# Altium PCB ESP_Final.PcbDoc
Units mil, origin at the board's own origin, x right, y up, seen from the top; angles counter-clockwise.
Board outline 4241 x 3936 mil, 2 copper layers (Top Layer, Bottom Layer); 101 components, 74 nets, 281 pads, 118 vias.
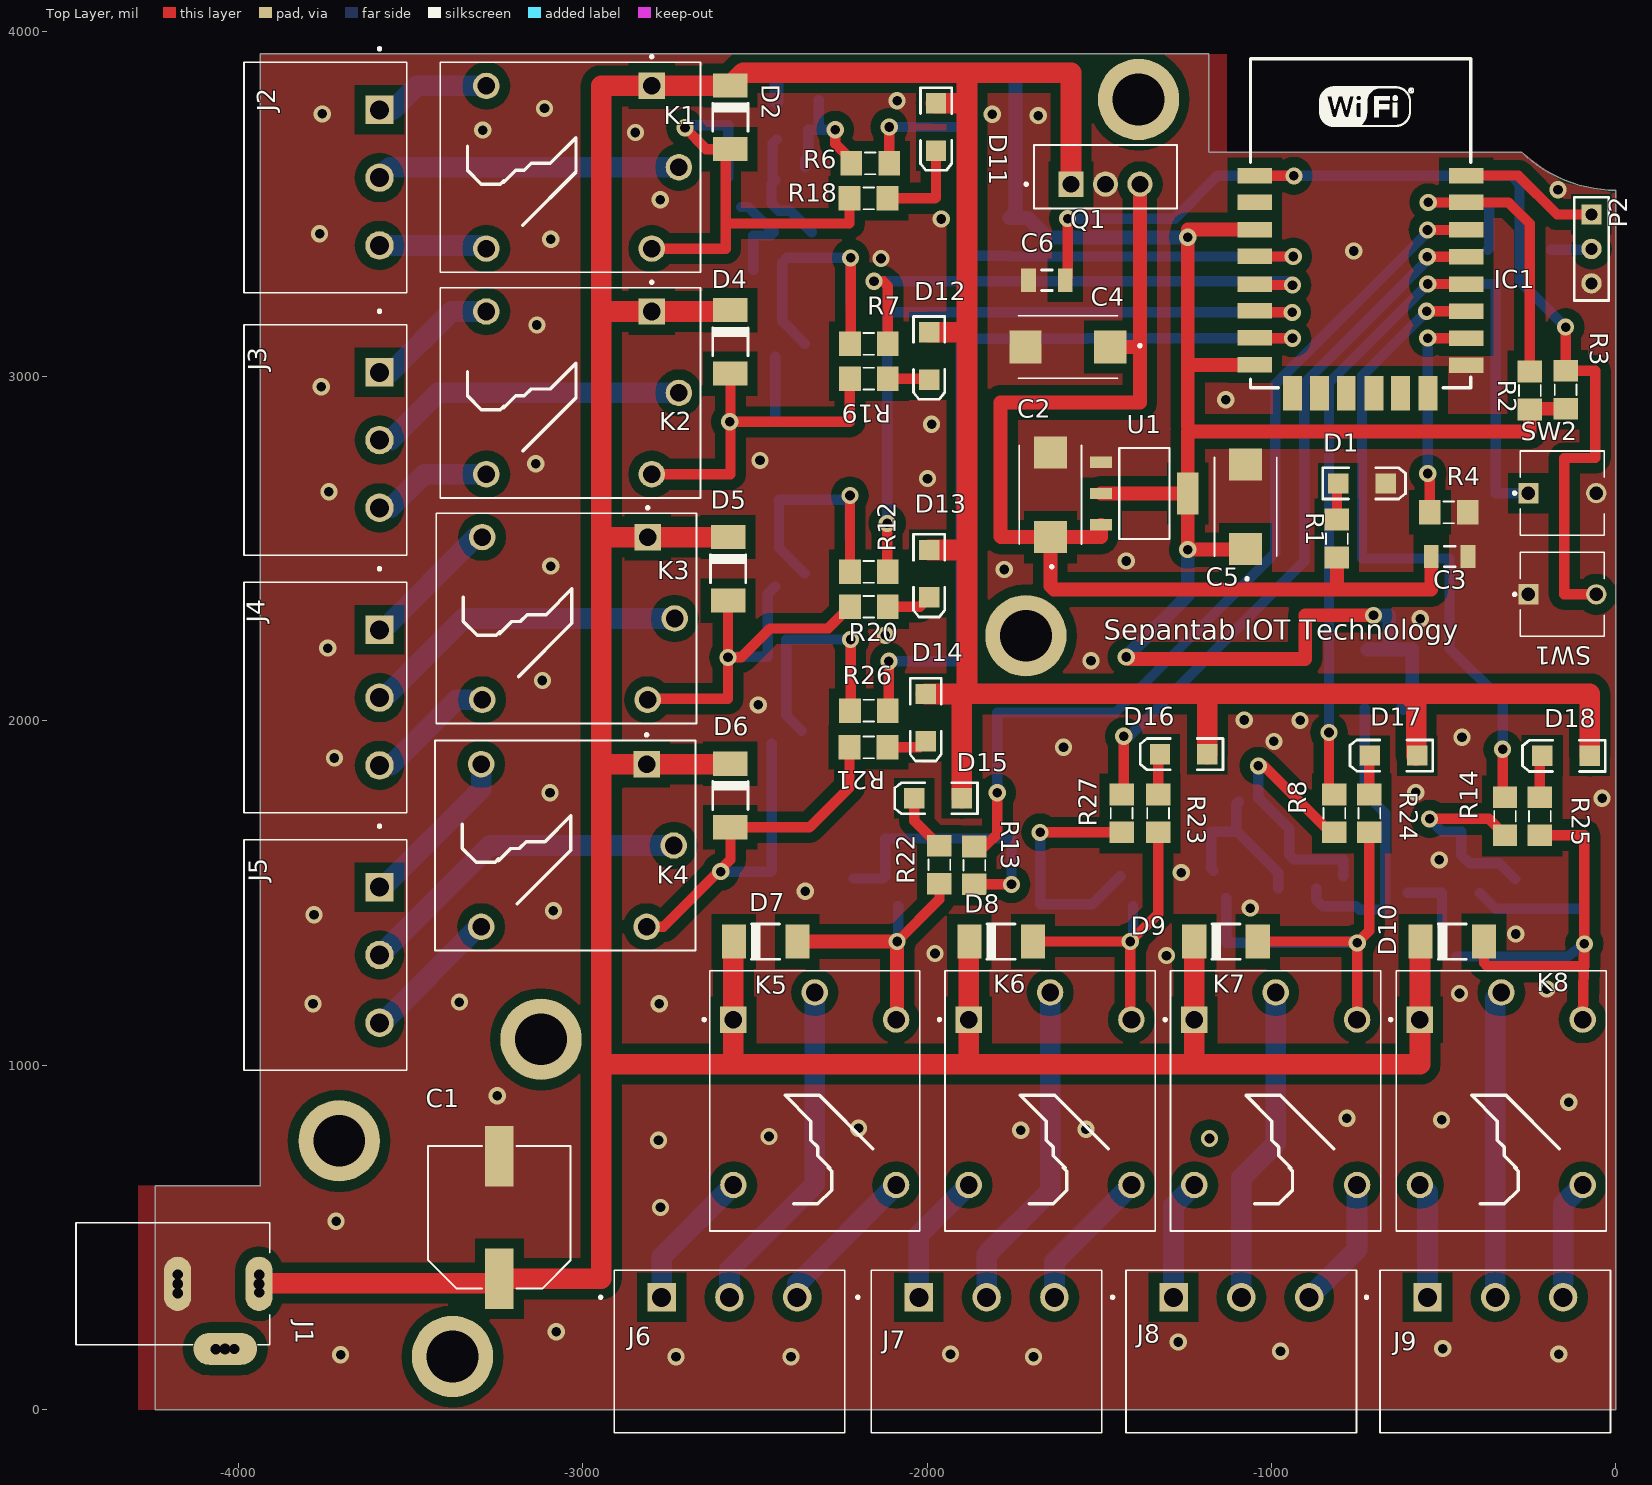
[diagram p0: Top Layer view]
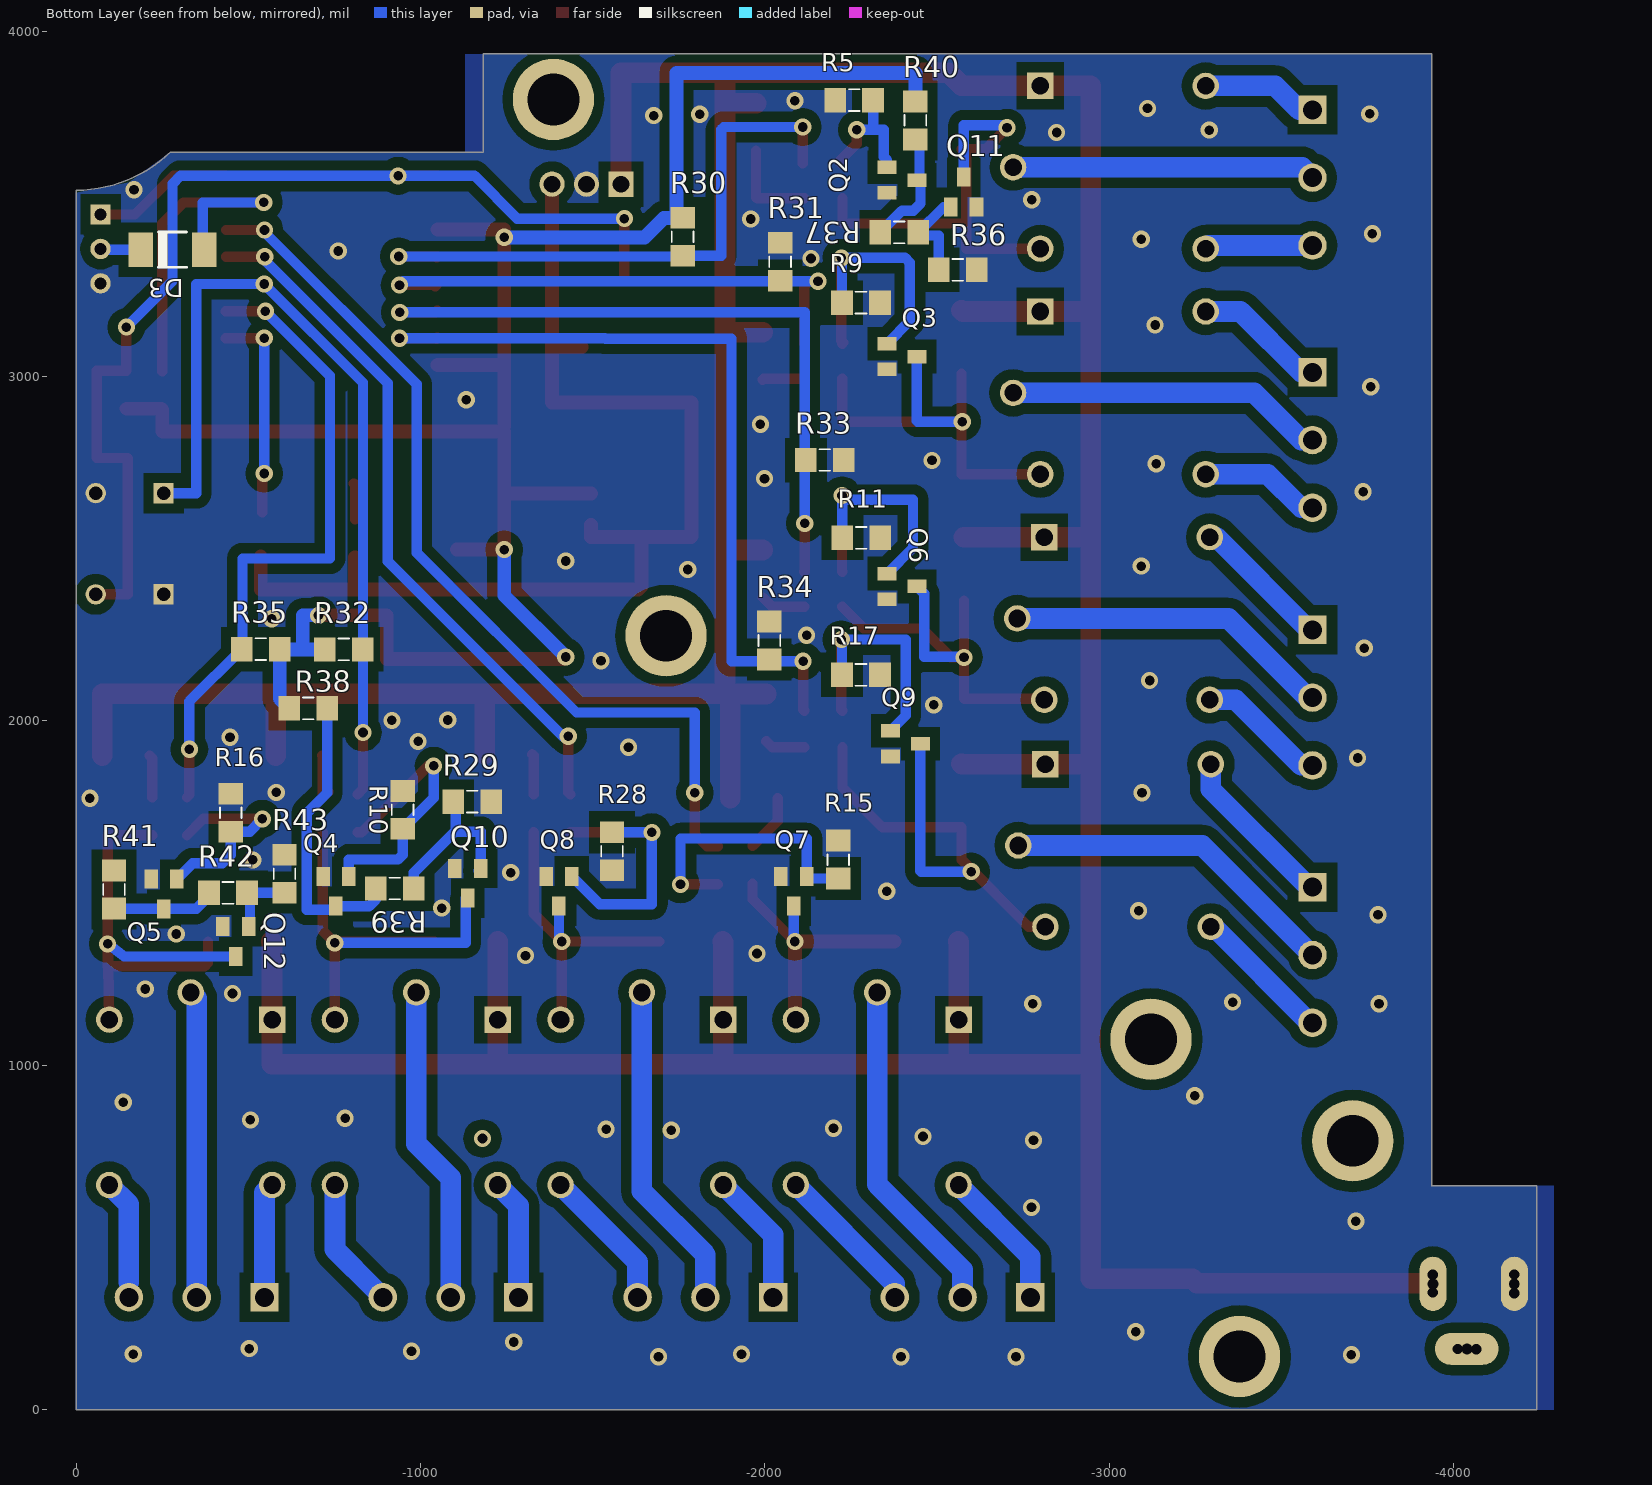
[diagram p1: Bottom Layer view, seen from below]

## Layer stack, top to bottom
Top Solder: solder mask 0.4, Solder Resist, Dk 3.5
Top Layer: signal copper 1.4
Dielectric 1: dielectric 12.6, FR-4, Dk 4.8
Bottom Layer: signal copper 1.4
Bottom Solder: solder mask 0.4, Solder Resist, Dk 3.5

## Board outline
-4241,0 -4241,650.34 -3936,650.34 -3936,3936 -1182,3936 -1182,3651 -274,3651 -273.62,3651.39 ccw(c3.25,3939.75) 0,3540 0,0

## Design rules (kind name [scope] priority, off if disabled: settings)
Clearance [All] p1: gap=10 ignorepadtopadclearanceinfootprint=FALSE except(0: Arc-Hole Track-Hole SMDPad-Hole THPad-Hole Via-Hole Fill-Hole Poly-Hole Region-Hole Text-Hole; 30: Arc-Poly Track-Poly SMDPad-Poly THPad-Poly Via-Poly Fill-Poly Poly-Poly)
Height [All] p1: minheight=0 maxheight=5000 prefheight=500
HoleSize [All] p1: absolutevalues=TRUE maxlimit=150 minlimit=1 maxpercent=80.000 minpercent=20.000
HoleToHoleClearance [All] p1: gap=2.5 allowstackedmicrovias=TRUE
PlaneConnect [All] p1: planeconnectstyle=Direct reliefexpansion=20 reliefentries=4 reliefconductorwidth=10 reliefairgap=10
PolygonConnect [All] p1: connectstyle=Direct reliefconductorwidth=10 reliefentries=4 polygonreliefangle="90 Angle" airgapwidth=20
RoutingVias [All] p1: holewidth=28 width=50 viastyle="Through Hole" minholewidth=28 minwidth=50 maxholewidth=28 maxwidth=50
SilkToSilkClearance [All] p1: silktosilkclearance=5
SilkToSolderMaskClearance [IsPad] p1: minsilkscreentomaskgap=5 clearancetoexposedcopper=TRUE
SolderMaskExpansion [All] p1: expansion=4
Width [All] p1: maxlimit=60 minlimit=10 preferedwidth=10
24 further rules are at their usual default settings.

## Components (designator, comment, footprint, x,y, rotation, side; value= is the part's Value field where it differs from the comment)
C1 "HZA107M050G24T-F" *CAPAE1030X1050N -3242,558 r90 top
C2 "100uF" *CAPPM7343X310N -1642,2656 r90 top
C3 "Cap Semi" C1206 -483,2477 r0 top value=01.uF
C4 "100uF" *CAPPM7343X310N -1591,3085 r180 top
C5 "100uF" *CAPPM7343X310N -1075,2621 r90 top
C6 "Cap Semi" C1206 -1652,3279 r180 top value=01.uF
D1 "LED2" 3.2X1.6X1.1 -737,2689 r0 top
D2 "S1M" 1N4007*DO-214AC1N4007S1M1N4007Primary1N4007 -2571,3752 r270 top
D3 "S1M" 1N4007*DO-214AC1N4007S1M1N4007Primary1N4007 -280,3368 r180 bottom
D4 "S1M" 1N4007*DO-214AC1N4007S1M1N4007Primary1N4007 -2571,3100 r270 top
D5 "S1M" 1N4007*DO-214AC1N4007S1M1N4007Primary1N4007 -2578,2441 r270 top
D6 "S1M" 1N4007*DO-214AC1N4007S1M1N4007Primary1N4007 -2571,1783 r270 top
D7 "S1M" 1N4007*DO-214AC1N4007S1M1N4007Primary1N4007 -2469,1359 r0 top
D8 "S1M" 1N4007*DO-214AC1N4007S1M1N4007Primary1N4007 -1785,1359 r0 top
D9 "S1M" 1N4007*DO-214AC1N4007S1M1N4007Primary1N4007 -1132,1359 r0 top
D10 "S1M" 1N4007*DO-214AC1N4007S1M1N4007Primary1N4007 -475,1359 r0 top
D11 "LED2" 3.2X1.6X1.1 -1974,3724 r270 top
D12 "LED2" 3.2X1.6X1.1 -1994,3059.5 r270 top
D13 "LED2" 3.2X1.6X1.1 -1994,2427 r270 top
D14 "LED2" 3.2X1.6X1.1 -2004,2009 r270 top
D15 "LED2" 3.2X1.6X1.1 -1968,1775 r180 top
D16 "LED2" 3.2X1.6X1.1 -1255,1903 r180 top
D17 "LED2" 3.2X1.6X1.1 -646.1,1899 r180 top
D18 "LED2" 3.2X1.6X1.1 -145,1898 r180 top
IC1 "ESP8266 ESP-12-E" "ESP8266 ESP-12-E" -396,2937 r0 top
J1 "DC-005" *NINIGI_DC-005 -4038.2,365 r0 top
J2 "1757488" *PHOENIX_1757488 -3590,3777 r270 top
J3 "1757488" *PHOENIX_1757488 -3590,3015 r270 top
J4 "1757488" *PHOENIX_1757488 -3590,2267.15 r270 top
J5 "1757488" *PHOENIX_1757488 -3590,1519.85 r270 top
J6 "1757488" *PHOENIX_1757488 -2774,326 r0 top
J7 "1757488" *PHOENIX_1757488 -2027.15,326 r0 top
J8 "1757488" *PHOENIX_1757488 -1287.52,326 r0 top
J9 "1757488" *PHOENIX_1757488 -550.15,326 r0 top
K1 "1-1721150-0" *TE_ORWH-SH-105D1F,000 -2799.42,3843.32 r180 top
K2 "1-1721150-0" *TE_ORWH-SH-105D1F,000 -2799.42,3188.27 r180 top
K3 "1-1721150-0" *TE_ORWH-SH-105D1F,000 -2811.42,2533.22 r180 top
K4 "1-1721150-0" *TE_ORWH-SH-105D1F,000 -2814.42,1874 r180 top
K5 "1-1721150-0" *TE_ORWH-SH-105D1F,000 -2562.44,1132.32 r270 top
K6 "1-1721150-0" *TE_ORWH-SH-105D1F,000 -1879.1,1132.32 r270 top
K7 "1-1721150-0" *TE_ORWH-SH-105D1F,000 -1224.05,1132.32 r270 top
K8 "1-1721150-0" *TE_ORWH-SH-105D1F,000 -569,1132.32 r270 top
P2 "Header 3" HDR1X3 -71,3470 r270 top
Q1 "LM7805CT/NOPB" *TO254P1054X470X2600-3 -1582,3558 r0 top
Q2 "2N7002" *SOT23 -2398,3570 r270 bottom
Q3 "2N7002" *SOT23 -2398,3057.5 r270 bottom
Q4 "2N7002" *SOT23 -754.51,1505 r0 bottom
Q5 "2N7002" *SOT23 -255,1497 r0 bottom
Q6 "2N7002" *SOT23 -2398,2390 r270 bottom
Q7 "2N7002" *SOT23 -2084,1505 r0 bottom
Q8 "2N7002" *SOT23 -1402,1505 r0 bottom
Q9 "2N7002" *SOT23 -2408,1933.53 r270 bottom
Q10 "2N7002" *SOT23 -1137,1528 r0 bottom
Q11 "2N7002" *SOT23 -2577,3535 r180 bottom
Q12 "2N7002" *SOT23 -463.4,1358.69 r0 bottom
R1 "1K" *RESC3216X65 -810,2529 r270 top
R2 "4.3K" *RESC3216X65 -250,2959 r90 top
R3 "10K" *RESC3216X65 -146,2961 r90 top
R4 "1K" *RESC3216X65 -485,2605 r0 top
R5 "100K" *RESC3216X65 -2259,3802 r0 bottom
R6 "100" *RESC3216X65 -2165,3618.22 r180 top
R7 "100" *RESC3216X65 -2169,3094.5 r180 top
R8 "100" *RESC3216X65 -817.22,1731 r270 top
R9 "100K" *RESC3216X65 -2279,3214 r180 bottom
R10 "100K" *RESC3216X65 -948,1741.12 r90 bottom
R11 "100K" *RESC3216X65 -2280,2531 r180 bottom
R12 "100" *RESC3216X65 -2169,2432.22 r180 top
R13 "100" *RESC3216X65 -1863,1580 r270 top
R14 "100" *RESC3216X65 -322,1723 r270 top
R15 "100K" *RESC3216X65 -2213,1597 r90 bottom
R16 "100K" *RESC3216X65 -449,1733 r90 bottom
R17 "100K" *RESC3216X65 -2279,2133 r180 bottom
R18 "1K" *RESC3216X65 -2170,3517 r180 top
R19 "1K" *RESC3216X65 -2169,2993.27 r180 top
R20 "1K" *RESC3216X65 -2169,2331 r180 top
R21 "1K" *RESC3216X65 -2170,1923 r180 top
R22 "1K" *RESC3216X65 -1964.22,1582 r270 top
R23 "1K" *RESC3216X65 -1329,1731 r270 top
R24 "1K" *RESC3216X65 -716,1731 r270 top
R25 "1K" *RESC3216X65 -220.78,1723 r270 top
R26 "100" *RESC3216X65 -2169,2029.13 r180 top
R27 "100" *RESC3216X65 -1435,1731 r270 top
R28 "100K" *RESC3216X65 -1556,1621 r270 bottom
R29 "100K" *RESC3216X65 -1150,1765 r180 bottom
R30 "10K" *RESC3216X65 -1761,3405 r90 bottom
R31 "10K" *RESC3216X65 -2044,3333 r90 bottom
R32 "10K" *RESC3216X65 -777,2207 r180 bottom
R33 "10K" *RESC3216X65 -2174,2757 r180 bottom
R34 "10K" *RESC3216X65 -2013,2233 r90 bottom
R35 "10K" *RESC3216X65 -536,2208 r0 bottom
R36 "100K" *RESC3216X65 -2560,3309 r180 bottom
R37 "10K" *RESC3216X65 -2390,3418 r180 bottom
R38 "10K" *RESC3216X65 -674,2036 r0 bottom
R39 "10K" *RESC3216X65 -925,1513 r0 bottom
R40 "10K" *RESC3216X65 -2437,3743 r270 bottom
R41 "10K" *RESC3216X65 -110,1510 r270 bottom
R42 "10K" *RESC3216X65 -441,1500 r0 bottom
R43 "100K" *RESC3216X65 -605,1556 r90 bottom
SW1 "147694-1" *TE_FSM8JRT -254,2367 r0 top
SW2 "147694-1" *TE_FSM8JRT -254,2661 r0 top
U1 "LM1117MP-3.3" *SOT230P696X180-4N -1369.11,2660 r0 top

## Footprints (in the part's own frame and the unit in brackets; to place one, negate y for a bottom-side part, rotate by r counter-clockwise, add the part's x,y. Pads: shape width x height; smd on the part's side, far side on the other; paste and mask are expansions set on the pad)
1N4007*DO-214AC1N4007S1M1N4007Primary1N4007 [mil]
  rect 70x100 smd: A(92.22,0) C(-92.22,0)
  silkscreen extent -42,-51 40,51
3.2X1.6X1.1 [mm] "SMT LED; 2 Flat Leads"
  rect 1.5x1.5 smd: 1(-1.75,0) 2(1.75,0)
  silkscreen extent -2.9,-1.15 3.2,1.15
*CAPAE1030X1050N [mm]
  rect 4.46x2.12 smd: 1(-4.525,0) 2(4.525,0)
  silkscreen extent -5.25,-5.25 5.25,5.25
*CAPPM7343X310N [mm]
  rect 2.37x2.43 smd: 1(-3.12,0) 2(3.12,0)
  silkscreen extent -5.41,-2.3 3.65,2.3
*NINIGI_DC-005 [mm]
  oval 4.7x2.35 hole 0.8: 2(0,-4.8)
  oval 2x4 hole 0.8: 3(-3.5,0) 4(2.5,0)
  silkscreen extent -11,-4.5 3.3,4.5
*PHOENIX_1757488 [mm]
  rect 2.1x2.1 hole 1.4: 1(0.08,0)
  round 2.1 hole 1.4: 2(5.08,0) 3(10.08,0)
  silkscreen extent -4.52,-10 13.58,2
*RESC3216X65 [mm]
  rect 1.6x1.8 smd: 1(-1.4,0) 2(1.4,0)
  silkscreen extent -0.4,-0.8 0.4,0.8
*SOT23 [mm]
  rect 1x1.4 smd: 1(-0.95,-1.1) 2(0.95,-1.1) 3(0,1.1)
*SOT230P696X180-4N [mil]
  rect 63x33 smd: 1(-126,91) 2(-126,0) 3(-126,-91)
  rect 63x122 smd: 4(126,0)
  silkscreen extent -73,-132 73,132
*TE_FSM8JRT [mil]
  rect 59x59 hole 39: 1(0,0)
  round 59 hole 39: 2(197,0)
  silkscreen extent -44,-122 220,122
*TE_ORWH-SH-105D1F,000 [mm]
  rect 1.95x1.95 hole 1.3: 1(0,0)
  round 1.95 hole 1.3: 2(0,12) 3(-2,6) 4(12.2,0) 5(12.2,12)
  silkscreen extent -3.6,-2.26 15.6,13.75
*TO254P1054X470X2600-3 [mm]
  rect 1.86x1.86 hole 1.24: 1(0,0)
  round 1.86 hole 1.24: 2(2.54,0) 3(5.08,0)
  silkscreen extent -3.41,-1.8 7.81,2.9
C1206 [mm] "Chip Capacitor, Body 3.2x1.6mm, IPC High Density"
  rect 1.1x1.7 smd: 1(-1.35,0) 2(1.35,0)
  silkscreen extent -0.4,-0.75 0.4,0.75, body extent -1.7,-0.9 1.7,0.9, height 1.3
"ESP8266 ESP-12-E" [mil] "ESP8266 ESP-12-E"
  rect 100x45 smd: 1(-653,646) 2(-653,568) 3(-653,489) 4(-653,411) 5(-653,331) 6(-653,253) 7(-653,175) 8(-653,96) 15(-38,95) 16(-38,174) 17(-38,252) 18(-39,331) 19(-39,410) 20(-39,488) 21(-39,568) 22(-39,646)
  rect 55x100 smd: 9(-543,14) 10(-465,14) 11(-387,14) 12(-307,14) 13(-229,14) 14(-149,14)
  silkscreen extent -665,30 -25,985, body extent -661,37 -31,981, height 86
HDR1X3 [mm] "Connector; Header; 3 Position"
  rect 1.5x1.5 hole 0.9: 1(0,0)
  round 1.5 hole 0.9: 2(2.54,0) 3(5.08,0)
  silkscreen extent -1.27,-1.27 6.35,1.27

## Part data
C1: "Cap Aluminum Polymer Hybrid 100uF 50VDC 20% _10 X 10.2mm_ SMD 0.028 Ohm 2000mA 10000h 105C Automotive T/R", Package="Radial Cornell Dubilier", Availability=Unavailable, MF="Cornell Dubilier", MP=HZA107M050G24T-F, Price=None, SnapEDA_Link=https://www.snapeda.com/parts/HZA107M050G24T-F/Cornell%20Dubilier%20Electronics%20%28CDE%29/view-part/?ref=snap
C2 C4 C5: library part 293D107X9016D2TE3, "10% precision, 16V, 100uF, solid tantalum surface mount chip capacitors, D case code", Package="2917 Vishay", Availability=Unavailable, MF="Vishay Sprague", MP=293D107X9016D2TE3, Price=None, SnapEDA_Link=https://www.snapeda.com/parts/293D107X9016D2TE3/Vishay%20Sprague/view-part/?ref=snap
C3 C6: "Capacitor (Semiconductor SIM Model)", LatestRevisionDate=29-May-2009, LatestRevisionNote="IPC-7351 Footprint Added.", PackageDescription="Chip Capacitor", PackageReference=C1206, Published=8-Jun-2000, Publisher="Altium Limited"
D1 D11 D12 D13 D14 D15 D16 D17 D18: "Typical RED, GREEN, YELLOW, AMBER GaAs LED", LatestRevisionDate=17-Jul-2002, LatestRevisionNote="Re-released for DXP Platform.", PackageDescription="SM LED; 2 Flat Leads", PackageReference=3.2X1.6X1.1, PackageVersion=Feb-2002, Published=8-Jun-2000, Publisher="Altium Limited"
D2 D3 D4 D5 D6 D7 D8 D9 D10: "S1 Series 1000 V 1 A 1 uA Surface Mount General Purpose Rectifier - DO-214AC", Package="DO-214AC-214 ON Semiconductor", Digi-Key_Part_Number=S1MFSCT-ND, Digi-Key_Purchase_URL=https://www.digikey.de/product-detail/en/on-semiconductor/S1M/S1MFSCT-ND/965721?utm_source=snapeda&utm_medium=aggregator&utm_campaign=symbol, MF="ON Semiconductor", MP=S1M, SnapEDA_Link=https://www.snapeda.com/parts/S1M/ON%20Semiconductor/view-part/?ref=snap
J1: Package="0603 Ninigi", Availability=Unavailable, MF="Littelfuse Inc.", MP=DC-005, Price=None, SnapEDA_Link=https://www.snapeda.com/parts/DC-005/Littelfuse%20Inc./view-part/?ref=snap
J2 J3 J4 J5 J6 J7 J8 J9: "Conn; TermBlk; PCB; Header; SnglLvl; 90DegAngl; Sldr; 3Pole; 5mmPitch; COMBICON", Package=None, Availability=Unavailable, MF="Phoenix Contact", MP=1757488, Price=None, SnapEDA_Link=https://www.snapeda.com/parts/1757488/Phoenix%20Contact/view-part/?ref=snap
K1 K2 K3 K4 K5 K6 K7 K8: library part ORWH-SH-105D1F,000, "General Purpose Relay, ORWH Series, Power, Non Latching, SPDT, 5 VDC, 10 A", Package=None, Availability=Unavailable, MF="TE Connectivity", MP=ORWH-SH-105D1F,000, Price=None, SnapEDA_Link=https://www.snapeda.com/parts/ORWH-SH-105D1F%2C000/TE%20Connectivity%20Potter%20%26%20Brumfield%20Relays/view-part/?ref=snap, TE_purchase_URL=https://www.te.com/usa-en/product-1-1721150-0.html?te_bu=Cor&te_type=disp&te_campaign=seda_glo_cor-seda-global-disp-prtnr-fy19-seda-model-bom-cta_sma-317_1&elqCampaignId=32493
P2: "Header, 3-Pin", LatestRevisionDate=17-Jul-2002, LatestRevisionNote="Re-released for DXP Platform.", Publisher="Altium Limited"
Q1: Package="TO-220 ON Semiconductor", Availability=Unavailable, MF="ON Semiconductor", MP=LM7805CT, Price=None, SnapEDA_Link=https://www.snapeda.com/parts/LM7805CT/ON%20Semiconductor/view-part/?ref=snap
Q2 Q3 Q4 Q5 Q6 Q7 Q8 Q9 Q10 Q11 Q12: "Transistor NPN Mos 2N7002 SILICONIX miliampere=100 V=60 SOt23", Package="SOT-23-3 Vishay", Availability=Unavailable, MF=STMicroelectronics, MP=2N7002, Price=None, SnapEDA_Link=https://www.snapeda.com/parts/2N7002/STMicroelectronics/view-part/?ref=snap
R1 R2 R3 R4 R5 R6 R7 R8 R9 R10 R11 R12 R13 R14 R15 R16 R17 R18 R19 R20 R21 R22 R23 R24 R25 R26 R27 R28 R29 R30 R31 R32 R33 R34 R35 R36 R37 R38 R39 R40 R41 R42 R43: library part RC1206FR-075K11L, "RC Series 1206 0.25 W 5.11 kOhms 1% ±100 ppm/°C SMT Thick Film Chip Resistor", Package="3116 Yageo", Availability=Unavailable, MF=Yageo, MP=RC1206FR-075K11L, Price=None, SnapEDA_Link=https://www.snapeda.com/parts/RC1206FR-075K11L/Yageo/view-part/?ref=snap
SW1 SW2: library part FSM8JRT, "FSM8JRT=SWITCH,PUSHBUTTON,TACT", Contact_Current_Rating="50 mA", Package=None, Availability=Unavailable, Configuration_Pole-Throw="Single Pole - Single Throw", EU_RoHS_Compliance=Compliant, MF="TE Connectivity", MP=FSM8JRT, Price=None, SnapEDA_Link=https://www.snapeda.com/parts/FSM8JRT/TE%20Connectivity%20ALCOSWITCH%20Switches/view-part/?ref=snap, TE_purchase_URL=https://www.te.com/usa-en/product-147694-1.html?te_bu=Cor&te_type=disp&te_campaign=seda_glo_cor-seda-global-disp-prtnr-fy19-seda-model-bom-cta_sma-317_1&elqCampaignId=32493
U1: "LDO Regulator Pos 3.3V 0.8A 4-Pin_3+Tab_ SOT-223 T/R", Package="SOT-223 Texas Instruments", Availability=Unavailable, MF="Texas Instruments", MP=LM1117MP-3.3, Price=None, SnapEDA_Link=https://www.snapeda.com/parts/LM1117MP-3.3/Texas%20Instruments/view-part/?ref=snap

## Free pads (board coordinates)
  round 60 hole 30: 2(-4065,175) 2(-4012,176) 16(-4176,338) 17(-4176,392) 18(-3939,340) 19(-3939,391)
  round 236.22 hole 150: 5(-3707,780) 5(-3378,154) 5(-3121,1075) 5(-1713,2247) 5(-1386,3804)

## Via types
v1: diameter 50, hole 28, Top Layer to Bottom Layer, 118 vias

## Nets (pads, with @x,y where several pads share a name; then routed paths per layer and width w, separated by ;. In a path a pad name is that pad's centre, name@x,y a point inside that pad or via, vN(x,y) a via of type N, cw(c..) or ccw(c..) an arc to the next point about the centre after c; other vN are vias at no path point)
3.3V: C5.1 IC1.3 IC1.8 R2.1 R3.1 R30.2 R32.1 R35.1 R38.2 R40.1 U1.2 U1.4 | length 6294.8
  Top Layer w40: U1.2 U1.4 ; v1(-1422,2185) -1416,2179 -902.25,2179 -902.25,2306 v1(-704,2306) ; -1243.11,2854 -1243.11,3033 ; C5.1@-1105.17,2497 v1(-1243.11,2497) U1.4 ; IC1.8 -1243.11,3033 ; IC1.3 -1243.11,3426 v1(-1243.11,3404) -1243.11,3033 ; R3.1 -248,2905.88 R2.1 -250,2840 -1243.11,2840 U1.4
  Bottom Layer w40: R40.1 -2437,3881 -1743,3881 -1743,3478.12 R30.2 -1707.12,3460.12 -1650,3403 -1244.11,3403 v1(-1243.11,3404) ; v1(-1422,2185) -1243.11,2363.89 v1(-1243.11,2497) ; R32.1 -658,2207 ; v1(-704,2306) -659,2306 -658,2305 -658,2207 ; R38.2 -591.12,2063.76 R35.1 -592.12,2207 -658,2207
5V: C2.1 C3.1 C4.1 Q1.3 R1.2 U1.3 | length 3286.1
  Top Layer w40: U1.3 -1495.11,2533.17 C2.1 ; C4.1 -1385.94,3085 -1382,3088.94 ; Q1.3 -1382,3088.94 ; R1.2 -810,2383 -808,2381 ; C3.1 -536.15,2381 -808,2381 ; C2.1 -1785.17,2533.17 -1787,2535 -1787,2924 -1382,2924 -1382,3088.94 ; C2.1 -1642,2391 -1632,2381 -808,2381
12V: C1.1 D2.C D4.C D5.C D6.C D7.C D8.C D9.C D10.C D11.1 D12.1 D13.1 D14.1 D15.1 D16.1 D17.1 D18.1 J1.4 K1.1 K2.1 K3.1 K4.1 K5.1 K6.1 K7.1 K8.1 pad.18 pad.19 Q1.1 | length 15967.6
  Top Layer w30: -1879.1,1003.1 -1879,1003 ; -1226,1003 -1224.05,1004.95
  Top Layer w60: J1.4@-3939.78,367 -3254.85,367 C1.1 -2946,379.85 -2946,1003 ; D5.C K3.1 -2940.78,2533.22 -2946,2528 ; D6.C -2572.22,1874 K4.1 -2945,1874 -2946,1873 ; D4.C -2574.96,3188.27 K2.1 -2943.73,3188.27 -2946,3186 ; D7.C -2562.44,1357.78 K5.1 -2562.44,1003.44 -2562,1003 ; D14.1 -1905.9,2077.9 ; D13.1 -1884.1,2495.9 -1884,2496 ; D12.1 -1885.61,3128.39 -1884,3130 ; D11.1 -1886.1,3792.9 -1884,3795 ; D15.1 -1899.1,2062.9 -1884,2078 ; -1884,3878 -1884,3795 ; -1879.1,1003.1 K6.1 -1879.1,1357.13 D8.C ; Q1.1 -1582,3882 -2533.22,3882 D2.C -2571.91,3843.32 K1.1 -2946,3843.32 -2946,3186 ; D9.C -1224.05,1358.82 K7.1 -1224.05,1004.95 ; D16.1 -1186.1,2074.1 -1190,2078 ; D17.1@-580,1899 -580,2052 -606,2078 ; D10.C -569,1357.23 K8.1 -569,1003 -1226,1003 -1879,1003 -2562,1003 ; D18.1 -76.1,2078 -606,2078 ; -2946,1003 -2946,1873 ; -2946,1003 -2562,1003 ; -2946,1873 -2946,2528 ; -2946,2528 -2946,3186 ; -1884,2078 -1884,2496 ; -1884,2078 -1190,2078 ; -1884,2496 -1884,3130 ; -1884,3130 -1884,3795 ; -1190,2078 -606,2078
GND: C1.2 C2.2 C3.2 C4.2 C5.2 C6.2 D1.2 IC1.15 J1.3 P2.3 pad.16 pad.17 Q1.2 Q2.2 Q3.2 Q4.2 Q5.2 Q6.2 Q7.2 Q8.2 Q9.2 Q10.2 Q11.2 Q12.2 R4.2 R5.2 R9.2 R10.2 R11.2 R15.2 R16.2 R17.2 R28.2 R29.2 R31.2 R33.2 R34.2 R36.2 R43.2 SW1.1 SW2.2 U1.1
  other v1: -2729,153 -2395,153 -1691,153 -3703,159 -1932,161 -166,161 -974,169 -503,177 -1271,196 -3077,226 -3716,547 -2774,587 -2780,782 -2459,793 -1728,811 -1539,814 -2199,817 -506,841 -781,846 -137,892 -3248,911 -3783,1178 -2778,1178 -3358,1183 -454,1208 -201,1221 -1305,1318 -1977,1324 -291,1381 -3780,1437 -3085,1448 -1062,1456 -2354,1505 -1262,1559 -513,1596 -40,1775 -3095,1791 -581,1792 -3721,1892 -1604,1923 -993,1940 -447,1952 -917,2001 -1079,2002 -2490,2046 -3117,2117 -1524,2174 -3740,2211 -2121,2248 -568,2296 -1776,2439 -3093,2449 -1422,2464 -3737,2665 -1999,2703 -3136,2746 -2485,2756 -1987,2861 -1133,2932 -3759,2970 -3133,3149 -2134,3342 -761,3364 -3093,3398 -3764,3414 -1959,3457 -2775,3513 -168,3542 -2847,3708 -3290,3715 -1677,3757 -1811,3761 -3756,3762 -3111,3778 -2087,3800
"GPIO 0": IC1.18 R8.1 R32.2 SW2.1 | length 2617.3
  Top Layer w30: v1(-833,1966) -833,1801.9 R8.1 ; v1(-546,3268) IC1.18
  Bottom Layer w30: v1(-833,1966) -833,2981 v1(-546,3268) -349,3268 -349,2661 SW2.1
"GPIO 1": IC1.22 P2.1 | length 410.8
  Top Layer w30: IC1.22 -283,3583 -170,3470 P2.1
"GPIO 2": IC1.17 R14.1 R35.2 | length 1924.8
  Top Layer w30: v1(-549.61,3189) IC1.17 ; v1(-329,1917) -329,1785.12 R14.1
  Bottom Layer w30: v1(-549.61,3189) -737,3001.61 -737,2471 -483,2471 -483,2210.12 R35.2 -329,2056.12 v1(-329,1917)
"GPIO 3": D3.A IC1.21 R2.2 | length 1065.3
  Top Layer w30: v1(-545,3505) IC1.21 -312,3505 -250,3443 R2.2
  Bottom Layer w30: v1(-545,3505) -368,3505 -368,3372.22 D3.A
"GPIO 4": IC1.19 R27.1 | length 2050.7
  Top Layer w30: R27.1 -1429,1792.12 v1(-1429,1955) ; v1(-548,3347) IC1.19
  Bottom Layer w30: v1(-1429,1955) -1413,1955 -905,2463 -905,2979.71 -548,3336.71 v1(-548,3347)
"GPIO 5": IC1.20 R13.1 | length 2666.1
  Top Layer w30: R13.1 -1831.88,1635.12 -1796,1671 v1(-1796,1791) ; v1(-547,3425) IC1.20
  Bottom Layer w30: v1(-1796,1791) -1796,2024 -1453,2024 -989,2488 -989,2976.71 -547,3418.71 v1(-547,3425)
"GPIO 9": IC1.11
"GPIO 10": IC1.12
"GPIO 12": IC1.6 R12.1 R33.1 | length 2041.2
  Top Layer w30: v1(-2116,2573) -2116,2434.34 R12.1 ; IC1.6 -1044.74,3185.74 v1(-940,3185.74)
  Bottom Layer w30: v1(-2116,2573) -2116,3185.74 v1(-940,3185.74)
"GPIO 13": IC1.7 R26.1 R34.1 | length 2365.7
  Top Layer w30: R26.1 -2111,2032.01 v1(-2111,2173) ; IC1.7 -1046,3109 -1044.26,3110.74 v1(-939,3110.74)
  Bottom Layer w30: v1(-2111,2173) -1903,2173 -1903,3109 -1537,3109 -1535.26,3110.74 v1(-939,3110.74)
"GPIO 14": IC1.5 R7.1 R31.1 | length 1546.8
  Top Layer w30: v1(-2154,3276) -2127.76,3276 -2113.88,3262.12 R7.1 ; IC1.5 -1043,3262 -1040,3265 v1(-939,3265)
  Bottom Layer w30: v1(-2154,3276) -950,3276 v1(-939,3265)
"GPIO 16": IC1.4 R6.1 R30.1 | length 1763.2
  Top Layer w30: v1(-2110,3724) -2110,3618.34 R6.1 ; IC1.4 -1047,3346 -1045,3348 v1(-937,3348)
  Bottom Layer w30: v1(-2110,3724) -1880,3724 -1872.88,3716.88 -1872.88,3349.88 R30.1 -1759.12,3348 v1(-937,3348)
NetC6_1: C6.1 IC1.1 R3.2 SW1.2 | length 3185.6
  Top Layer w30: C6.1 -1592,3285.85 v1(-1592,3458) ; IC1.1 -1048,3582 v1(-935,3582) ; v1(-146,3143) R3.2 -60,3016.12 -60,2763 -150,2763 -150,2367 SW1.2
  Bottom Layer w30: v1(-1592,3458) -1281,3458 -1157,3582 v1(-935,3582) -303,3582 -280,3559 -280,3277 v1(-146,3143)
NetD1_1: D1.1 R1.1 | length 106.6
  Top Layer w30: R1.1 -810,2684.9 D1.1
NetD3_C: D3.C P2.2 | length 117.6
  Bottom Layer w30: D3.C -73,3368 P2.2
NetD11_2: D11.2 R18.1 | length 278.4
  Top Layer w30: R18.1 -1977.71,3517 -1976.71,3518 -1974,3518 D11.2
NetD12_2: D12.2 R19.1 | length 121
  Top Layer w30: R19.1 -1996.68,2993.27 D12.2
NetD13_2: D13.2 R20.1 | length 131.1
  Top Layer w30: R20.1 -2021.1,2331 D13.2
NetD14_2: D14.2 R21.1 | length 118
  Top Layer w30: R21.1 -2021.1,1923 D14.2
NetD15_2: D15.2 R22.1 | length 168
  Top Layer w30: D15.2 -2036.9,1709.79 R22.1
NetD16_2: D16.2 R23.1 | length 119
  Top Layer w30: R23.1 -1329,1897.9 D16.2
NetD17_2: D17.2 R24.1 | length 132.4
  Top Layer w30: R24.1@-732,1793.65 -724.46,1786.12 R24.1 -716,1898 D17.2
NetD18_2: D18.2 R25.1 | length 122.7
  Top Layer w30: R25.1 -220.78,1891.12 D18.2
NetIC1_16: IC1.16 R4.1 | length 620.4
  Top Layer w30: v1(-546,2718) -540.12,2712.12 R4.1 ; v1(-546,3111) IC1.16
  Bottom Layer w30: v1(-546,2718) v1(-546,3111)
NetJ2_1: J2.1 K1.4 | length 339
  Bottom Layer w60: J2.1 -3551.15,3773.85 -3481.68,3843.32 K1.4
NetJ2_2: J2.2 K1.3 | length 881.8
  Bottom Layer w60: J2.2 -3559.9,3607.1 K1.3
NetJ2_3: J2.3 K1.5 | length 314.1
  Bottom Layer w60: J2.3 -3289.01,3380.15 K1.5
NetJ3_1: J3.1 K2.4 | length 350.3
  Bottom Layer w60: J3.1@-3557,3011.85 -3380.58,3188.27 K2.4
NetJ3_2: J3.2 K2.3 | length 893.1
  Bottom Layer w60: J3.2@-3557,2815 -3419.95,2952.05 K2.3
NetJ3_3: J3.3 K2.5 | length 317.7
  Bottom Layer w60: J3.3@-3557,2618.15 -3459.32,2715.83 K2.5
NetJ4_1: J4.1 K3.4 | length 413.7
  Bottom Layer w60: J4.1 -3579.42,2264 -3310.2,2533.22 K3.4 K3.4@-3291.74,2529.26
NetJ4_2: J4.2 K3.3 | length 952.5
  Bottom Layer w60: J4.2 -3575.85,2067.15 -3346,2297 K3.3
NetJ4_3: J4.3 K3.5 | length 377.2
  Bottom Layer w60: J4.3 -3557,1870.3 -3366.52,2060.78 K3.5
NetJ5_1: J5.1 K4.4 | length 482.7
  Bottom Layer w60: J5.1@-3584.65,1511.35 -3294.74,1801.26 K4.4
NetJ5_2: J5.2 K4.3 | length 988.7
  Bottom Layer w60: J5.2@-3583.57,1313.43 -3583.57,1324.43 -3270.22,1637.78 K4.3
NetJ5_3: J5.3 K4.5 | length 408.3
  Bottom Layer w60: J5.3@-3586,1119 -3303.44,1401.56 K4.5
NetJ6_1: J6.1 K5.4 | length 368.3
  Bottom Layer w60: -2770.7,370 -2770.7,443.74 K5.4
NetJ6_2: J6.2 K5.3 | length 987.6
  Bottom Layer w60: J6.2@-2573.85,326 -2573.85,406.15 -2326.22,653.78 K5.3
NetJ6_3: J6.3 K5.5 | length 449.9
  Bottom Layer w60: J6.3 -2377.15,364.85 K5.5 K5.5@-2095,652
NetJ7_1: J7.1 K6.4 | length 386
  Bottom Layer w60: J7.1 -2024,507.1 K6.4
NetJ7_2: J7.2 K6.3 | length 961.4
  Bottom Layer w60: J7.2 -1827.15,449.85 -1642.88,634.12 K6.3
NetJ7_3: J7.3 K6.5 | length 418.6
  Bottom Layer w60: J7.3 -1630.3,428.36 K6.5
NetJ8_1: J8.1 K7.4 | length 351
  Bottom Layer w60: J8.1 -1284.37,591.68 K7.4
NetJ8_2: J8.2 K7.3 | length 926.4
  Bottom Layer w60: J8.2 -1087.52,672.48 -987.83,772.17 K7.3
NetJ8_3: J8.3 K7.5 | length 352.5
  Bottom Layer w60: J8.3@-868.67,348 -751.61,465.06 K7.5
NetJ9_1: J9.1 K8.4 | length 335.1
  Bottom Layer w60: K8.4 -547,630 J9.1
NetJ9_2: J9.2 K8.3 | length 892.3
  Bottom Layer w60: J9.2 -350.15,1193.68 K8.3
NetJ9_3: J9.3 K8.5 | length 305.5
  Bottom Layer w60: -153.3,370 -153.3,595.26 K8.5
NetQ2_1: Q2.1 R5.1 R6.2 | length 399.7
  Top Layer w30: v1(-2267,3716) -2267,3675.34 -2215,3623.34 R6.2
  Bottom Layer w30: Q2.1 -2354.69,3627.21 -2344.91,3637 -2344.91,3716 -2310,3716 ; R5.1 -2314.12,3720.12 -2310,3716 ; v1(-2267,3716) -2310,3716
NetQ2_3: Q2.3 R37.1 R40.2 | length 350.4
  Bottom Layer w30: R40.2 -2449,3675.88 -2449,3577.69 Q2.3 -2452,3559.31 -2452,3502 -2431,3481 -2397.88,3481 R37.1
NetQ3_1: Q3.1 R7.2 R9.1 | length 851.7
  Top Layer w30: R7.2 -2228,3098.38 -2222,3104.38 v1(-2222,3344)
  Bottom Layer w30: Q3.1 -2421,3161.21 -2421,3330 -2407,3344 v1(-2222,3344) -2223.88,3342.12 R9.1
NetQ4_1: Q4.1 R8.2 R10.1 | length 815.1
  Top Layer w30: v1(-1038,1869) -1022,1869 -828.88,1675.88 R8.2
  Bottom Layer w30: v1@-1032,1863 v1(-1038,1869) -1038,1776 R10.1 -948,1611 -933.91,1596.91 -791.91,1596.91 Q4.1
NetQ4_3: Q4.3 R38.1 R39.2 | length 853.9
  Bottom Layer w30: R39.2 -869.88,1480.88 -850.69,1461.69 Q4.3 -743.82,1451 -670,1451 -670,1732 -729.12,1791.12 R38.1
NetQ5_1: Q5.1 R14.2 R16.1 | length 599.2
  Top Layer w30: v1(-541,1715) -369.12,1715 R14.2
  Bottom Layer w30: v1(-541,1715) -503.88,1677.88 R16.1 -449,1610 -425,1586 -338.09,1586 Q5.1
NetQ5_3: Q5.3 R41.2 R42.2 | length 304.6
  Bottom Layer w30: R42.2@-394.88,1500 -348.57,1453.69 Q5.3 -111.19,1453.69 R41.2
NetQ6_1: Q6.1 R11.1 R12.2 | length 800.7
  Top Layer w30: R12.2 -2224,2432.34 v1(-2224,2654)
  Bottom Layer w30: Q6.1 -2430,2502.71 -2430,2642 -2236,2642 v1@-2224.88,2653.12 ; R11.1 v1@-2224.88,2653.12 ; v1(-2224,2654) v1@-2224.88,2653.12
NetQ7_1: Q7.1 R13.2 R15.1 | length 811.5
  Top Layer w30: R13.2 v1(-1754.88,1524.88)
  Bottom Layer w30: R15.1 -2127.83,1541.88 Q7.1 -2121.4,1657.88 -1754.88,1657.88 v1(-1754.88,1524.88)
NetQ8_1: Q8.1 R27.2 R28.1 | length 827.9
  Top Layer w30: v1(-1671.88,1675.88) R27.2
  Bottom Layer w30: R28.1 -1671.65,1676.12 v1(-1671.88,1675.88) -1671.88,1467 -1520.71,1467 Q8.1
NetQ9_1: Q9.1 R17.1 R26.2 | length 782
  Top Layer w30: R26.2 -2222,2031.24 v1(-2222,2236)
  Bottom Layer w30: Q9.1 -2409,2015.24 -2409,2236 v1(-2222,2236) -2223.88,2234.12 R17.1
NetQ10_1: Q10.1 R29.1 R39.1 | length 496.1
  Bottom Layer w30: Q10.1@-1168.4,1564.31 -1175,1570.91 -1175,1678 -1105,1678 -1102,1681 ; R29.1 -1102,1757.88 -1102,1681 ; R39.1 -980.12,1559.12 -1102,1681
NetQ11_1: Q11.1 R36.1 R37.2 | length 288.5
  Bottom Layer w30: Q11.1 -2518.81,3491.69 R37.2 -2454.12,3409 -2504.88,3409 R36.1
NetQ12_1: Q12.1 R42.1 R43.1 | length 200
  Bottom Layer w30: R43.1 -506,1500.88 -506,1500 -505.12,1499.12 -505.12,1406.31 Q12.1
"Relay 1": D2.A K1.2 Q11.3 R18.2 | length 1379.9
  Top Layer w30: K1.2 -2585,3370.88 -2585,3443 ; v1(-2703,3722) -2640.78,3659.78 D2.A -2585,3645.78 -2585,3443 ; R18.2 -2225.12,3443.88 -2584.12,3443.88 -2585,3443
  Bottom Layer w30: v1(-2703,3722) -2696,3729 -2577,3729 Q11.3
"Relay 2": D4.A K2.2 Q3.3 R19.2 | length 1312.1
  Top Layer w30: K2.2 -2571,2715.83 v1@-2571,2868 ; D4.A v1@-2571,2868 ; R19.2 -2224.12,2868 v1@-2571,2868
  Bottom Layer w30: v1(-2573,2868) -2444,2868 -2441.31,2870.69 Q3.3
"Relay 3": D5.A K3.2 Q6.3 R20.2 | length 1263.3
  Top Layer w30: K3.2 -2808.2,2064 -2578,2064 v1(-2578,2184) ; D5.A v1(-2578,2184) ; R20.2 -2287.12,2268 -2456,2268 -2540,2184 v1(-2578,2184)
  Bottom Layer w30: v1(-2578,2184) -2576.31,2185.69 -2463,2185.69 -2463,2368.31 Q6.3
"Relay 4": D6.A K4.2 Q9.3 R21.2 | length 1446.5
  Top Layer w30: K4.2 -2765.44,1401.56 -2571,1596 D6.A -2341.22,1690.78 -2225.12,1806.88 R21.2
  Bottom Layer w30: v1(-2599,1562) -2454,1562 -2451.31,1564.69 Q9.3
"Relay 5": D7.A K5.2 Q7.3 R22.2 | length 840.4
  Top Layer w30: v1(-2087,1359) -1964.22,1481.78 R22.2
  Top Layer w40: D7.A v1(-2087,1359) -2087,1135.32 K5.2
  Bottom Layer w30: v1(-2087,1359) -2084,1362 Q7.3
"Relay 6": D8.A K6.2 Q8.3 R23.2 | length 967.3
  Top Layer w30: D8.A v1(-1410,1359) ; K6.2 -1410,1135.66 v1(-1410,1359) ; R23.2 -1329,1440 v1(-1410,1359)
  Bottom Layer w30: v1(-1410,1359) -1402,1367 Q8.3
"Relay 7": D9.A K7.2 Q10.3 R24.2 | length 1369.3
  Top Layer w30: D9.A -751,1359 v1(-751,1355) ; K7.2 -751,1132.92 v1(-751,1355) ; R24.2 -716,1390 v1(-751,1355)
  Bottom Layer w30: Q10.3@-1131,1484.69 -1131,1355 v1(-751,1355) v1@-757,1361
"Relay 8": D10.A K8.2 Q12.3 R25.2 | length 1471.4
  Top Layer w30: D10.A -382.78,1296.78 -373,1287 -93.04,1287 ; R25.2 -91.56,1667.88 v1(-91.56,1352) ; K8.2 -93.04,1287 ; -93.04,1287 v1(-91.56,1352) ; -93.04,1287 -91.56,1287 v1(-91.56,1352)
  Bottom Layer w30: Q12.3 -140.17,1315.39 v1(-91.56,1352)
pads on no net: IC1.2 IC1.9 IC1.10 IC1.13 IC1.14 J1.2 R41.1
copper on no net:
  other v1: -1180,787

## Polygon pours and split planes (outlines as drawn)
GND on Top Layer "Bottom Layer-No Net" (solid, remove dead copper, pour order 32): -3935.67,3935.73 -1129.67,3935.73 -1129.67,3651 -274,3651 -152.4,3561.92 0.33,3531.28 0.33,-0.27 -4291.01,-0.27 -4291.01,650.07 -3935.67,650.07
GND on Bottom Layer "Bottom Layer-No Net" (solid, remove dead copper, pour order 34): -3935.67,3935.73 -1129.67,3935.73 -1129.67,3651 -273.09,3651 -154.54,3564.15 0.33,3533.08 0.33,-0.27 -4291.01,-0.27 -4291.01,650.07 -3935.67,650.07

## Silkscreen, mask and mechanical layers (free items; w line width, h text height)
Top Overlay:
  text "Sepantab IOT Technology" at -1487,2215 h100
Mechanical 1:
  lines w10: -4241,0 -4241,650.34 -3936,650.34 -3936,3936 -1182,3936 -1182,3651 -274,3651 ; -273.62,3651.39 ccw(c3.25,3939.75) 0,3540 0,0
Mechanical 13:
  lines w10: -4241,0 0,0

## Text inside footprints (layer, text, board x,y; h text height)
IC1: Mechanical 13 "CUTOUT POLYGON" at -1048.96,3877.59 h10; Mechanical 13 "ANTENNA AREA" at -1048.96,3897.59 h10